# Altium PCB Host.PcbDoc
Units mil, origin at the board's own origin, x right, y up, seen from the top; angles counter-clockwise.
Board outline 2990 x 2990 mil, 2 copper layers (Top Layer, Bottom Layer); 34 components, 33 nets, 209 pads, 62 vias.
Unrouted connection lines stored in the file: 28.
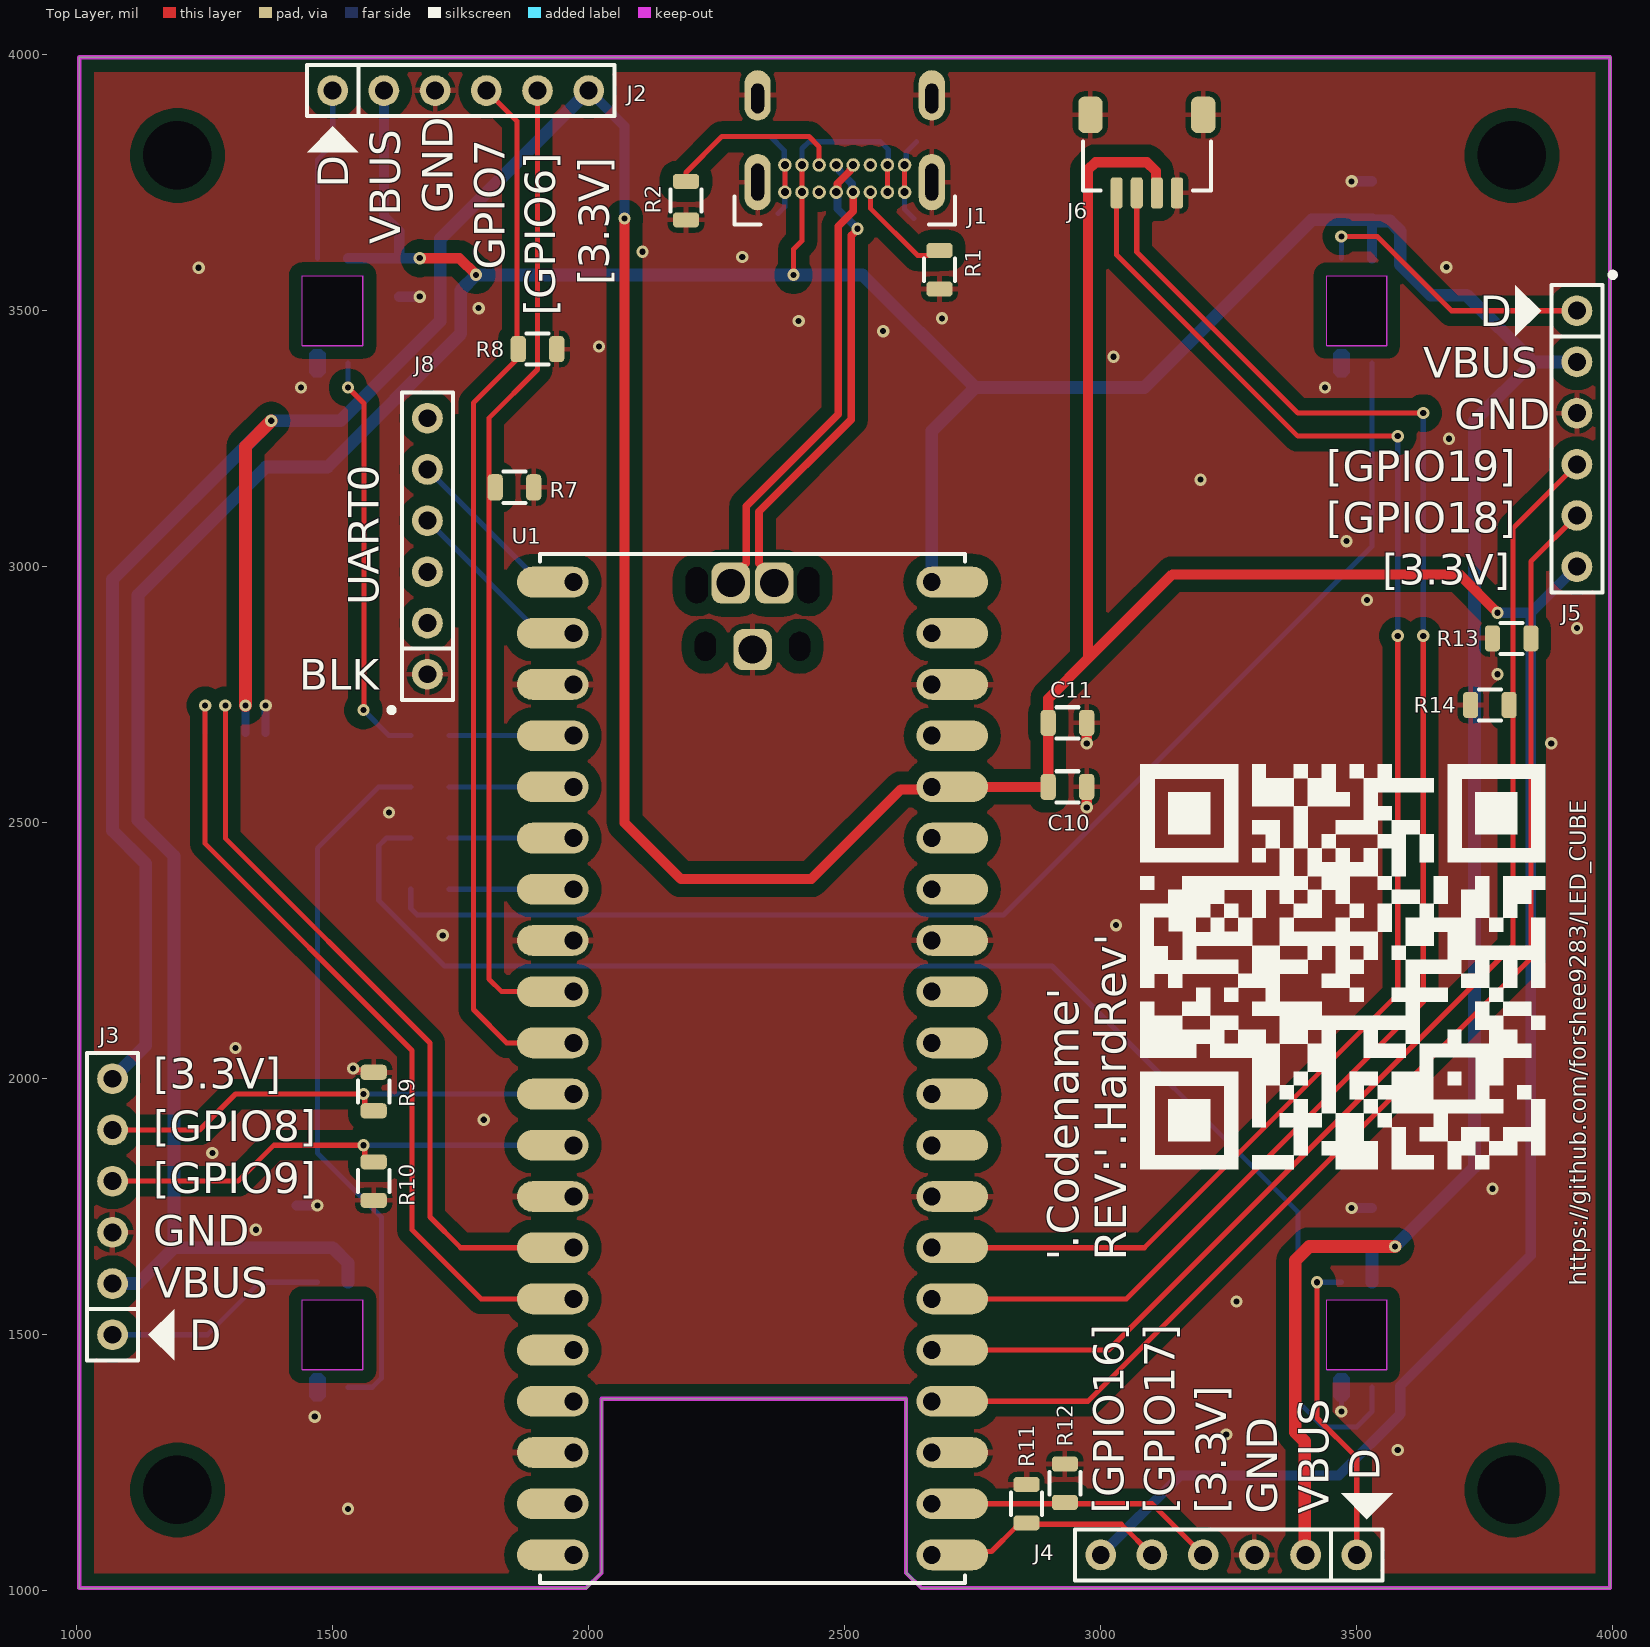
[diagram p0: Top Layer view]
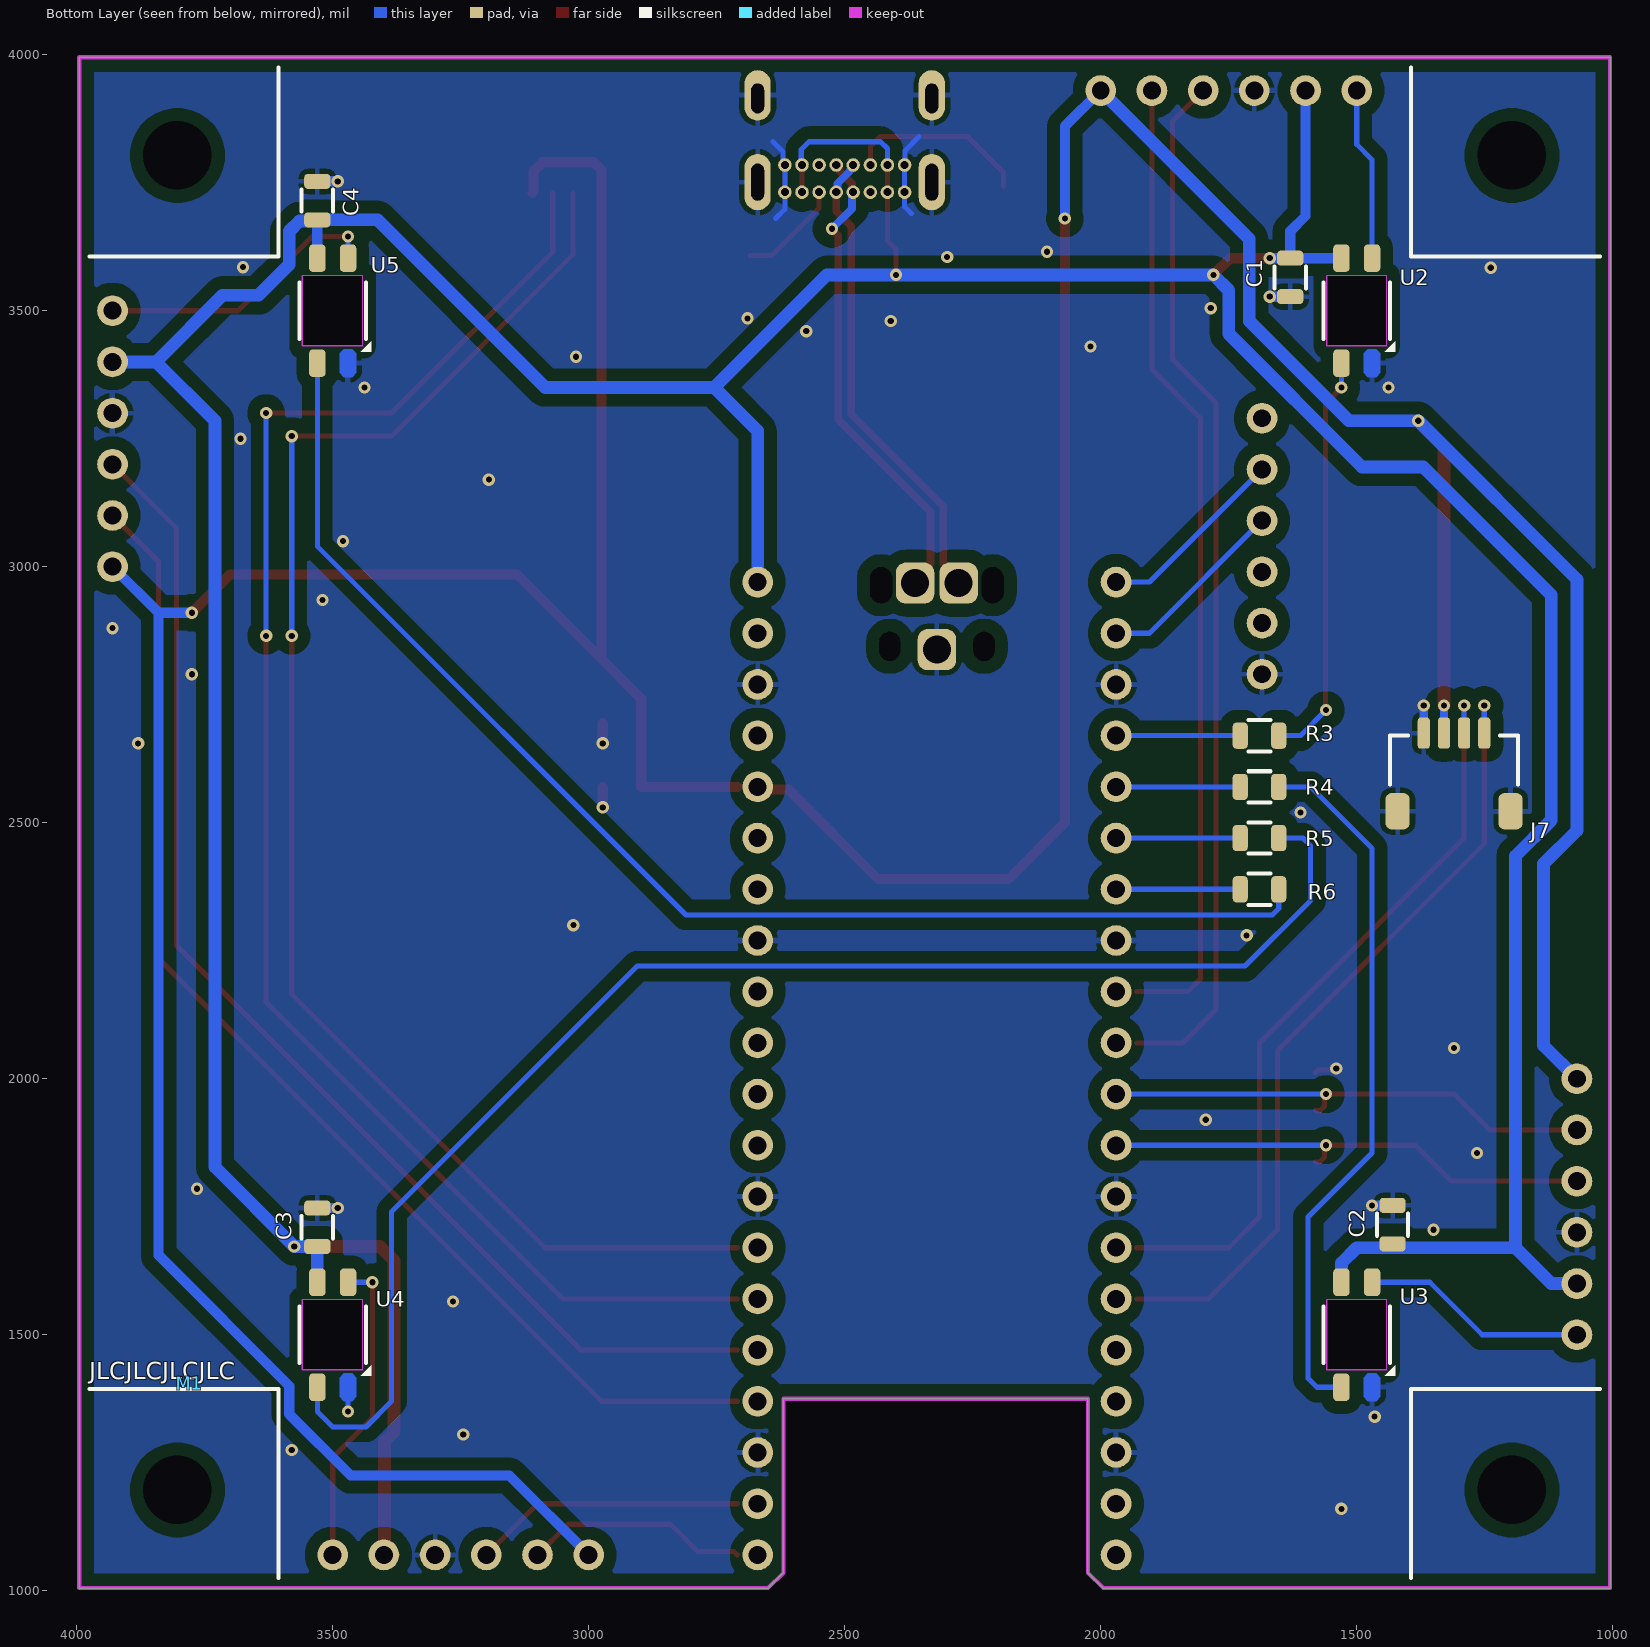
[diagram p1: Bottom Layer view, seen from below]

## Layer stack, top to bottom
Top Solder: solder mask 0.4, Solder Resist, Dk 3.5
Top Layer: signal copper 1.4
Dielectric 1: dielectric 12.6, FR-4, Dk 4.8
Bottom Layer: signal copper 1.4
Bottom Solder: solder mask 0.4, Solder Resist, Dk 3.5

## Board outline
1005,1005 1005,3995 3995,3995 3995,1005 2650,1005 2620,1035 2620,1375 2025,1375 2025,1035 1995,1005
cut-out: 1440.94,1568 1559.06,1568 1559.06,1432 1440.94,1432
cut-out: 3440.94,1568 3559.06,1568 3559.06,1432 3440.94,1432
cut-out: 3440.94,3568 3559.05,3568 3559.05,3432 3440.94,3432
cut-out: 1440.94,3568 1559.05,3568 1559.05,3432 1440.94,3432

## Design rules (kind name [scope] priority, off if disabled: settings)
Clearance Clearance_Poly [All vs InPoly] p1: gap=25 ignorepadtopadclearanceinfootprint=FALSE
Clearance [All] p2: gap=6.4 ignorepadtopadclearanceinfootprint=FALSE except(0: Arc-Hole Track-Hole SMDPad-Hole THPad-Hole Via-Hole Fill-Hole Poly-Hole Region-Hole Text-Hole)
DiffPairsRouting [All] p1: maxlimit=10 minlimit=10 mostfreqgap=10 toplayer_minwidth=15 toplayer_maxwidth=15 toplayer_prefwidth=15 bottomlayer_minwidth=15 bottomlayer_maxwidth=15 bottomlayer_prefwidth=15 maxuncoupledlength=500
HoleSize [All] p1: absolutevalues=TRUE maxlimit=99999 minlimit=1 maxpercent=80.000 minpercent=20.000
MinimumSolderMaskSliver [All] p1: minsoldermaskwidth=1.9
PlaneConnect [All] p1: pad.planeconnectstyle=Relief pad.reliefexpansion=20 pad.reliefentries=4 pad.reliefconductorwidth=10 pad.reliefairgap=10 via.planeconnectstyle=Direct via.reliefexpansion=20 via.reliefentries=4 via.reliefconductorwidth=10 via.reliefairgap=10
PolygonConnect [All] p1: thpad.connectstyle=Relief thpad.reliefconductorwidth=10 thpad.reliefentries=4 thpad.polygonreliefangle="90 Angle" thpad.airgapwidth=10 smdpad.connectstyle=Relief smdpad.reliefconductorwidth=10 smdpad.reliefentries=4 smdpad.polygonreliefangle="90 Angle" smdpad.airgapwidth=10 via.connectstyle=Direct via.reliefconductorwidth=10 via.reliefentries=4 via.polygonreliefangle="90 Angle" via.airgapwidth=10
RoutingVias [All] p1: holewidth=28 width=50 viastyle="Through Hole" minholewidth=28 minwidth=50 maxholewidth=28 maxwidth=50
SilkToSolderMaskClearance [IsPad] p1: minsilkscreentomaskgap=0 clearancetoexposedcopper=TRUE
SolderMaskExpansion [All] p1: expansion=4 istentingtop=FALSE
SupplyNets "Schematic Supply Nets_2" [InNet('GND')] p1: voltage=0.000
SupplyNets "Schematic Supply Nets_1" [InNet('USB_VBUS')] p2: voltage=0.000
SupplyNets "Schematic Supply Nets" [InNet('3.3V')] p3: voltage=0.000
Width [All] p1: maxlimit=10000 minlimit=6 preferedwidth=10
25 further rules are at their usual default settings.

## Classes and differential pairs
differential pair class DIFF90: USB_D USB_D_CON
differential pair USB_D: +USB_D_P -USB_D_N

## Components (designator, comment, footprint, x,y, rotation, side; value= is the part's Value field where it differs from the comment)
C1 "0.1µF" Chip0805 1630,3565 r90 bottom
C2 "0.1µF" Chip0805 1430,1715 r270 bottom
C3 "0.1µF" Chip0805 3530,1710 r270 bottom
C4 "0.1µF" Chip0805 3530,3715 r270 bottom
C10 "0.1µF" Chip0805 2935,2570 r180 top
C11 "10µF" Chip0805 2935,2695 r180 top
J1 "2137160001" MOLEX_2137160001 2500,3758 r180 top locked
J2 "HEADER_1x6_NO_BOM" HEADER_1x6_100mil_NP 1750,3930 r0 top locked
J3 "HEADER_1x6_NO_BOM" HEADER_1x6_100mil_NP 1070,1750 r90 top locked
J4 "HEADER_1x6_NO_BOM" HEADER_1x6_100mil_NP 3250,1070 r180 top locked
J5 "HEADER_1x6_NO_BOM" HEADER_1x6_100mil_NP 3930,3250 r270 top
J6 "SM04B-SRSS-TB" JST_SM04B-SRSS-TB 3085,3825 r180 top
J7 "SM04B-SRSS-TB" JST_SM04B-SRSS-TB 1305,2580 r180 bottom
J8 "HEADER_1x6_NO_BOM" HEADER_1x6_100mil_NP 1685,3040 r90 top
M1 "JLC_NUMBER" JLC_NUMBER 3780,1405 r180 bottom
R1 "5.1k" Chip0805 2685,3580 r90 top
R2 "5.1k" Chip0805 2190,3715 r90 top
R3 "330" Chip0805 1690,2670 r180 bottom
R4 "330" Chip0805 1690,2570 r180 bottom
R5 "330" Chip0805 1690,2470 r180 bottom
R6 "330" Chip0805 1690,2370 r180 bottom
R7 "1M" Chip0805 1855,3155 r180 top
R8 "1M" Chip0805 1900,3425 r180 top
R9 "1M" Chip0805 1580,1975 r270 top
R10 "1M" Chip0805 1580,1800 r90 top
R11 "1M" Chip0805 2855,1170 r270 top
R12 "1M" Chip0805 2930,1210 r270 top
R13 "1M" Chip0805 3802.4,2860 r0 top
R14 "1M" Chip0805 3760,2730 r0 top
U1 "Raspberry Pi Pico W" RASPBERRY_PI_PICO_W 2320,2020 r0 top
U2 "SK6812MINI-E" SK6812MINI-E 1500,3500 r90 bottom
U3 "SK6812MINI-E" SK6812MINI-E 1500,1500 r90 bottom
U4 "SK6812MINI-E" SK6812MINI-E 3500,1500 r90 bottom
U5 "SK6812MINI-E" SK6812MINI-E 3500,3500 r90 bottom

## Footprints (in the part's own frame and the unit in brackets; to place one, negate y for a bottom-side part, rotate by r counter-clockwise, add the part's x,y. Pads: shape width x height; smd on the part's side, far side on the other; paste and mask are expansions set on the pad)
Chip0805 [mm] "Chip Resistor, 2-Leads, Body 2.05x1.25mm, IPC Medium Density"
  rrect50% 0.75x1.3 smd: 1(-0.955,0) 2(0.955,0)
  silkscreen extent -0.55,-0.77 0.55,0.77, body extent -0.95,-0.55 0.95,0.55, height 0.5
HEADER_1x6_100mil_NP [mil]
  round 60 hole 35: 1(-250,0) 2(-150,0) 3(-50,0) 4(50,0) 5(150,0) 6(250,0)
  silkscreen extent -300,-50 300,50
JLC_NUMBER [mil]
JST_SM04B-SRSS-TB [mm]
  rrect50% 0.6x1.55 smd: 1(-1.627,2.413) 2(-0.627,2.413) 3(0.373,2.413) 4(1.373,2.413)
  rrect50% 1.2x1.8 smd: M1(-2.927,-1.462) M2(2.673,-1.462)
  silkscreen extent -3.3,-0.13 3.05,2.29, body extent -3.13,-2.12 2.87,2.83, height 2.97
MOLEX_2137160001 [mm]
  oval 1.3x2.794 hole 0.635 slot 1.829 at 90 deg: 1(-4.32,0.175) 2(4.32,0.175)
  oval 1.3x2.5 hole 0.635 slot 1.473 at 90 deg copper offset 0,-0.15: 3(-4.32,-3.975) 4(4.32,-3.975)
  round 0.673 hole 0.4: A1(-2.97,0.675) A4(-2.12,0.675) A5(-1.27,0.675) A6(-0.42,0.675) A7(0.42,0.675) A8(1.27,0.675) A9(2.12,0.675) A12(2.97,0.675) B1(2.97,-0.675) B4(2.12,-0.675) B5(1.27,-0.675) B6(0.42,-0.675) B7(-0.42,-0.675) B8(-1.27,-0.675) B9(-2.12,-0.675) B12(-2.97,-0.675)
  silkscreen extent -5.46,0.89 5.46,2.29, body extent -4.82,-7.39 4.82,1.58, height 3.37
RASPBERRY_PI_PICO_W [mil]
  round 5 hole 43.31 slot 70.87 at 90 deg unplated: 0(-108.9,943.82) 0(108.9,943.82)
  round 5 hole 41.34 slot 57.09 at 90 deg unplated: 0(-92.09,824.53) 0(92.09,824.53)
  oval 140x60 smd: 1(-390,950) 2(-390,850) 3(-390,750) 4(-390,650) 5(-390,550) 6(-390,450) 7(-390,350) 8(-390,250) 9(-390,150) 10(-390,50) 11(-390,-50) 12(-390,-150) 13(-390,-250) 14(-390,-350) 15(-390,-450) 16(-390,-550) 17(-390,-650) 18(-390,-750) 19(-390,-850) 20(-390,-950) 21(390,-950) 22(390,-850) 23(390,-750) 24(390,-650) 25(390,-550) 26(390,-450) 27(390,-350) 28(390,-250) 29(390,-150) 30(390,-50) 31(390,50) 32(390,150) 33(390,250) 34(390,350) 35(390,450) 36(390,550) 37(390,650) 38(390,750) 39(390,850) 40(390,950)
  round 60 hole 35: 1(-350,950) 2(-350,850) 3(-350,750) 4(-350,650) 5(-350,550) 6(-350,450) 7(-350,350) 8(-350,250) 9(-350,150) 10(-350,50) 11(-350,-50) 12(-350,-150) 13(-350,-250) 14(-350,-350) 15(-350,-450) 16(-350,-550) 17(-350,-650) 18(-350,-750) 19(-350,-850) 20(-350,-950) 21(350,-950) 22(350,-850) 23(350,-750) 24(350,-650) 25(350,-550) 26(350,-450) 27(350,-350) 28(350,-250) 29(350,-150) 30(350,-50) 31(350,50) 32(350,150) 33(350,250) 34(350,350) 35(350,450) 36(350,550) 37(350,650) 38(350,750) 39(350,850) 40(350,950)
  rrect50% 75x80 hole 55: TP1(0,818.11) TP2(42.5,948.03) TP3(-42.5,948.03)
  silkscreen extent -415,-1005 415,1005, body extent -413,-1003 413,1058, height 146
SK6812MINI-E [mil]
  rrect50% 54x32.28 smd: 1(102.53,30) 2(102.53,-30) 4(-102.53,30)
  round 1 smd: 3(-102.53,-30)
  Top Layer region: -83.6,-13.86 -75.53,-21.93 -75.53,-38.07 -83.6,-46.14 -121.46,-46.14 -129.53,-38.07 -129.53,-21.93 -121.46,-13.86
  Keep-Out Layer lines w1.97: -68,-59.06 -68,59.06 68,59.06 68,-59.06 -68,-59.06
  silkscreen extent -80,-75 55,65, body extent -116,-55 116,55, height 38

## Part data
C1 C2 C3 C4 C10: library part C2012X7T2E104K125AA, "CAP CER 0.1UF 250V 10% X7T 0805", Manufacturer="TDK Corporation", Operating Temperature="-55°C ~ 125°C", Package / Case="0805 (2012 Metric)", Ratings=-, Supplier Part Number 1=445-7749-1-ND, Temperature Coefficient=X7T, Tolerance=±10%, Voltage=250V, Applications="General Purpose", Capacitance=0.1µF, Features=-, Height - Seated (Max)=-, HelpURL=http://product.tdk.com/capacitor/mlcc/en/documents/mlcc_commercial_midvoltage_en.pdf, Lead Spacing=-, Lead Style=-, Manufacturer Part Number=C2012X7T2E104K125AA, Mounting Type="Surface Mount, MLCC", PartNumber=C2012X7T2E104K125AA, Series=C, Size / Dimension="0.079\" L x 0.049\" W (2.00mm x 1.25mm)", Supplier 1=Digi-Key, Supplier 2=Mouser, Thickness (Max)="0.057\" (1.45mm)"
C11: library part C2012X5R1C106K125AC, "CAP CER 10UF 16V 10% X5R 0805", Manufacturer="TDK Corporation", Operating Temperature="-55°C ~ 85°C", Package / Case="0805 (2012 Metric)", Ratings=-, Supplier Part Number 1=445-7646-1-ND, Temperature Coefficient=X5R, Tolerance=±10%, Voltage=16V, Applications="General Purpose", Capacitance=10µF, Features=-, Height - Seated (Max)=-, HelpURL=http://product.tdk.com/capacitor/mlcc/en/documents/mlcc_commercial_general_en.pdf, Lead Spacing=-, Lead Style=-, Manufacturer Part Number=C2012X5R1C106K125AC, Mounting Type="Surface Mount, MLCC", PartNumber=C2012X5R1C106K125AC, Series=C, Size / Dimension="0.079\" L x 0.049\" W (2.00mm x 1.25mm)", Supplier 1=Digi-Key, Supplier 2=Mouser, Thickness (Max)="0.057\" (1.45mm)"
J1: "CONN RCPT USB2.0 TYPE C 24POS RA", Manufacturer="Molex, LLC", Supplier Part Number 1=900-2137160001CT-ND, HelpURL=https://www.molex.com/pdm_docs/sd/2137160001_sd.pdf, Manufacturer Part Number=2137160001, PartNumber=2137160001, Supplier 1=Digi-Key, Supplier 2=Mouser, Supplier Part Number 2=538-213716-0001
J6 J7: "CONN HEADER SMD R/A 4POS 1MM", Manufacturer="JST Sales America Inc.", Supplier Part Number 1=455-SM04B-SRSS-TBCT-ND, HelpURL=https://www.jst-mfg.com/product/pdf/eng/eSH.pdf, Manufacturer Part Number=SM04B-SRSS-TB, PartNumber=SM04B-SRSS-TB, Supplier 1=Digi-Key, Supplier 2=Mouser
M1: "JLC Order Number Location", Manufacturer Part Number=JLC_NUMBER, PartNumber=JLC_NUMBER
R1 R2: library part CRCW08055K10FKEA, "RES 5.10K OHM 1/8W 1% 0805 SMD", Manufacturer="Vishay Dale", Package / Case="0805 (2012 Metric)", Power (Watts)="0.125W, 1/8W", Supplier Part Number 1=541-5.10KCCT-ND, Temperature Coefficient=±100ppm/°C, Tolerance=±1%, Composition="Thick Film", Features="Automotive AEC-Q200 Qualified", Height="0.020\" (0.50mm)", HelpURL=http://www.vishay.com/doc?20035, Manufacturer Part Number=CRCW08055K10FKEA, Number of Terminations=2, PartNumber=CRCW08055K10FKEA, Resistance=5.1k, Series=CRCW, Size / Dimension="0.079\" L x 0.049\" W (2.00mm x 1.25mm)", Supplier 1=Digi-Key, Supplier 2=Mouser, Supplier Device Package="0805 (2012 Metric)"
R3 R4 R5 R6: library part CRCW0805330RFKEA, "RES 330 OHM 1/8W 1% 0805 SMD", Manufacturer="Vishay Dale", Package / Case="0805 (2012 Metric)", Power (Watts)="0.125W, 1/8W", Supplier Part Number 1=541-330CCT-ND, Temperature Coefficient=±100ppm/°C, Tolerance=±1%, Composition="Thick Film", Features="Automotive AEC-Q200 Qualified", Height="0.020\" (0.50mm)", HelpURL=http://www.vishay.com/doc?20035, Manufacturer Part Number=CRCW0805330RFKEA, Number of Terminations=2, PartNumber=CRCW0805330RFKEA, Resistance=330, Series=CRCW, Size / Dimension="0.079\" L x 0.049\" W (2.00mm x 1.25mm)", Supplier 1=Digi-Key, Supplier 2=Mouser, Supplier Device Package="0805 (2012 Metric)"
R7 R8 R9 R10 R11 R12 R13 R14: library part CRCW08051M00FKEA, "RES 1.00M OHM 1/8W 1% 0805 SMD", Manufacturer="Vishay Dale", Package / Case="0805 (2012 Metric)", Power (Watts)="0.125W, 1/8W", Supplier Part Number 1=541-1.00MCCT-ND, Temperature Coefficient=±100ppm/°C, Tolerance=±1%, Composition="Thick Film", Features="Automotive AEC-Q200 Qualified", Height="0.020\" (0.50mm)", HelpURL=http://www.vishay.com/doc?20035, Manufacturer Part Number=CRCW08051M00FKEA, Number of Terminations=2, PartNumber=CRCW08051M00FKEA, Resistance=1M, Series=CRCW, Size / Dimension="0.079\" L x 0.049\" W (2.00mm x 1.25mm)", Supplier 1=Digi-Key, Supplier 2=Mouser, Supplier Device Package="0805 (2012 Metric)"
U1: "RASPBERRY PI PICO W", Manufacturer="Raspberry Pi", Manufacturer Part Number=SC0918, Supplier Part Number 1=2648-SC0918CT-ND, PartNumber="Raspberry Pi Pico W", Supplier 1=Digi-Key
U2 U3 U4 U5: "Addressable RGB LED", Manufacturer="Adafruit Industries LLC", Supplier Part Number 1=1528-4960-ND, Datasheets=https://cdn-shop.adafruit.com/product-files/4960/4960_SK6812MINI-E_REV02_EN.pdf, Manufacturer Part Number=SK6812MINI-E, PartNumber=SK6812MINI-E, Supplier 1=Digi-Key
J2 J3 J4 J5 J8: Manufacturer Part Number=HEADER_1x6_NO_BOM, PartNumber=HEADER_1x6_NO_BOM

## Free pads (board coordinates)
  round 10 hole 133.86 unplated: 0(1196.85,1196.85) 0(1196.85,3803.15) 0(3803.15,1196.85) 0(3803.15,3803.15)

## Via types
v1: diameter 24, hole 12, Top Layer to Bottom Layer, tented both sides, 62 vias

## Nets (pads, with @x,y where several pads share a name; then routed paths per layer and width w, separated by ;. In a path a pad name is that pad's centre, name@x,y a point inside that pad or via, vN(x,y) a via of type N, cw(c..) or ccw(c..) an arc to the next point about the centre after c; other vN are vias at no path point)
3.3V: C10.2 C11.2 J2.6 J3.6 J4.6 J5.6 J6.2 J7.2 U1.36 | length 10333.2
  Top Layer w20: v1(2070,3680) 2070,2500 2180,2390 2435,2390 2610,2565 2665,2565 U1.36@2670,2570 ; U1.36@2710,2570 C10.2 C11.2 2897.4,2742.4 2975,2820 ; J6.2 3107.87,3731.81 3107.87,3772.13 3090,3790 2990,3790 2975,3775 2975,2820 ; v1(3775,2910) 3700,2985 3140,2985 2975,2820
  Top Layer w25: v1(1329.68,2729.05) 1329.68,3234.68 v1(1380,3285)
  Bottom Layer w16: J7.2 v1(1329.68,2729.05)
  Bottom Layer w20: J2.6 2070,3860 v1(2070,3680) ; J4.6 3155,1225 3465,1225 3585,1345 3585,1400 3840,1655 3840,2910 ; v1(3775,2910) 3840,2910 ; J5.6 3840,2910
  Bottom Layer w25: J3.6 1135,2065 1135,2420 1070,2485 1070,2975 v1(1380,3285) 1515,3285 1710,3480 1710,3640 J2.6
DATA_0: R3.2 U2.4 | length 803.8
  Top Layer w10: v1(1530,3350) 1561,3319 1561,2721 v1(1560,2720)
  Bottom Layer w10: v1(1530,3350) U2.4 ; v1(1560,2720) 1610,2670 R3.2
DATA_0_OUT: J2.1 U2.2 | length 339.9
  Bottom Layer w10: U2.2 1470,3795 1500,3825 J2.1
DATA_1: R4.2 U3.4 | length 1391.1
  Bottom Layer w10: U3.4 1577.47,1397.47 1595,1415 1595,1730 1470,1855 1470,2450 1590,2570 R4.2
DATA_1_OUT: J3.1 U3.2 | length 442.5
  Bottom Layer w10: J3.1 1255,1500 1357.53,1602.53 U3.2
DATA_2: R5.2 U4.4 | length 2817.9
  Bottom Layer w10: R5.2 1605,2470 1590,2455 1590,2348.3 1718.3,2220 2905,2220 3385,1740 3385,1370 3435,1320 3500,1320 3530,1350 U4.4
DATA_2_OUT: J4.1 U4.2 | length 612.1
  Top Layer w10: v1(3422.53,1602.53) 3422.53,1337.47 3500,1260 J4.1
  Bottom Layer w10: v1(3422.53,1602.53) U4.2
DATA_3: R6.2 U5.4 | length 2575.9
  Bottom Layer w10: R6.2 1652.4,2332.6 1665,2320 2810,2320 3530,3040 U5.4
DATA_3_OUT: J5.1 U5.2 | length 562.5
  Top Layer w10: v1(3470,3645) 3540,3645 3685,3500 J5.1
  Bottom Layer w10: U5.2 v1(3470,3645)
GND: C1.1 C2.1 C3.1 C4.1 C10.1 C11.1 J1.1 J1.2 J1.3 J1.4 J1.A1 J1.A12 J1.B1 J1.B12 J2.3 J3.3 J4.3 J5.3 J6.1 J6.M1 J6.M2 J7.1 J7.M1 J7.M2 J8.1 R1.1 R2.1 R7.1 R8.1 R9.1 R10.1 R11.1 R12.1 R13.1 R14.1 U1.3 U1.8 U1.13 U1.18 U1.23 U1.28 U1.33 U1.38 U1.TP1 U2.3 U3.3 U4.3 U5.3 | length 825
  Top Layer w10: v1(1540,2020) 1542.68,2017.32 1575.28,2017.32 R9.1 ; J1.A12 J1.B1 ; J1.A1 J1.B12
  Top Layer w20: v1(2972.6,2530) C10.1 ; v1(2972.6,2655) C11.1
  Bottom Layer w10: 2355,3840 2381.93,3813.07 2381.93,3785.72 J1.B1 J1.A12 2382.93,3731.28 2382.93,3702.93 2370,3690 ; 2635,3680 2616.93,3698.07 J1.A1 J1.B12 2620.18,3787.83 2620.18,3810.18 2640,3830 ; v1(3470,1350) U4.3
  Bottom Layer w16: J7.1 v1(1369.06,2729.05)
  Bottom Layer w20: C2.1 v1(1470,1752.6) ; C1.1 v1(1670,3527.4) ; v1(3490,1747.6) C3.1 ; v1(3490,3752.6) C4.1
  other v1: 1530,1160 3580,1275 3245,1305 1465,1340 3265,1565 1350,1705 3765,1785 1265,1855 1795,1920 1310,2060 1715,2280 3030,2300 1610,2520 3880,2655 3775,2790 3930,2880 3520,2935 3480,3050 3195,3170 3680,3250 1438,3350 3438,3350 3025,3410 2020,3430 2575,3460 2410,3480 2690,3485 1785,3505 1238.24,3583.76 3675,3585 2300,3605 2105,3615
GPIO6: J2.5 R7.2 U1.9 | length 1909.7
  Top Layer w10: J2.5 1900,3385 1805,3290 1805,2195 1830,2170 U1.9@1930,2170
GPIO7: J2.4 R8.2 U1.10 | length 2037
  Top Layer w10: J2.4 1860,3870 1860,3405 1775,3320 1775,2135 1840,2070 U1.10@1930,2070
GPIO8: J3.5 R9.2 U1.11 | length 974.4
  Top Layer w10: J3.5 1240,1900 1310,1970 v1(1560,1970) 1562.68,1967.32 1562.68,1946.98 1572.26,1937.4 R9.2
  Bottom Layer w10: v1(1560,1970) U1.11@1970,1970
GPIO9: J3.4 R10.2 U1.12 | length 974.2
  Top Layer w10: J3.4 1315,1800 1385,1870 v1(1560,1870) 1562.68,1867.32 1562.68,1847.18 1572.26,1837.6 R10.2
  Bottom Layer w10: v1(1560,1870) U1.12@1970,1870
GPIO16: J4.5 R11.2 U1.21 | length 440
  Top Layer w10: U1.21@2710,1070 2716.82,1076.82 2786.82,1076.82 2834.11,1124.11 2834.59,1124.11 2840,1129.52 2840,1130 3040,1130 J4.5
GPIO17: J4.4 R12.2 U1.22 | length 531.4
  Top Layer w10: U1.22@2710,1170 3100,1170 J4.4
GPIO18: J5.5 R13.2 U1.24 | length 2390.6
  Top Layer w10: U1.24@2710,1370 2975,1370 3840,2235 3840,3010 J5.5
GPIO19: J5.4 R14.2 U1.25 | length 2414
  Top Layer w10: U1.25@2710,1470 3015,1470 3805,2260 3805,3075 J5.4
NetJ1_A5: J1.A5 R1.2 | length 204.7
  Top Layer w10: J1.A5 2550,3700 2642.44,3607.56 R1.2@2685,3607.56
NetJ1_B5: J1.B5 R2.2 | length 360.1
  Top Layer w10: R2.2@2190,3742.56 2190,3770 2260,3840 2430,3840 2450,3820 J1.B5
NetR3_1: R3.1 U1.4 | length 242.4
  Bottom Layer w10: R3.1 U1.4@1970,2670
NetR4_1: R4.1 U1.5 | length 242.4
  Bottom Layer w10: R4.1 U1.5@1970,2570
NetR5_1: R5.1 U1.6 | length 242.4
  Bottom Layer w10: R5.1 U1.6@1970,2470
NetR6_1: R6.1 U1.7 | length 242.4
  Bottom Layer w10: R6.1 U1.7@1970,2370
SCL0: J6.4 U1.27 | length 2981.7
  Top Layer w10: U1.27@2710,1670 3085,1670 3580,2165 v1(3580,2865) ; J6.4 3030.95,3609.05 3385,3255 v1(3580,3255)
  Bottom Layer w10: v1(3580,2865) v1(3580,3255)
SCL1: J7.4 U1.15 | length 1576.4
  Top Layer w10: v1(1250.94,2729.05) 1250.94,2459.06 1655,2055 1655,1705 1790,1570 U1.15@1930,1570
  Bottom Layer w10: J7.4 v1(1250.94,2729.05)
SDA0: J6.3 U1.26 | length 3115.6
  Top Layer w10: U1.26@2710,1570 3050,1570 3630,2150 v1(3630,2865) ; J6.3 3070.32,3614.68 3385,3300 v1(3630,3300)
  Bottom Layer w10: v1(3630,2865) v1(3630,3300)
SDA1: J7.3 U1.14 | length 1483.5
  Top Layer w10: v1(1290.32,2729.05) 1290.32,2469.69 1690,2070 1690,1730 1750,1670 U1.14@1930,1670
  Bottom Layer w10: J7.3 v1(1290.32,2729.05)
UART0_RX_TO_PI: J8.4 U1.2 | length 376.1
  Bottom Layer w10: J8.4 1905,2870 U1.2@1970,2870
UART0_TX_FROM_PI: J8.5 U1.1 | length 376.1
  Bottom Layer w10: J8.5 1905,2970 U1.1@1970,2970
USB_D_N: J1.A7 J1.B7 U1.TP2 | length 939.6
  Top Layer w15: U1.TP2 2362.5,2976.62 2332.5,3006.62 2332.5,3107.5 2512.5,3287.5 2512.5,3646.71 2525,3659.21 v1(2525,3660) ; J1.A7 2485.76,3733.72 2485.76,3748.12 2510.86,3773.23 2510.86,3775.66 2516.54,3781.33 J1.B7
  Bottom Layer w15: J1.A7 2485.76,3729.13 2485.76,3699.24 v1(2525,3660)
USB_D_P: J1.A6 J1.B6 U1.TP3 | length 929.3
  Top Layer w15: U1.TP3 2277.5,2976.62 2307.5,3006.62 2307.5,3117.86 2487.5,3297.86 2487.5,3665.13 2516.54,3694.17 J1.A6
  Bottom Layer w15: J1.B6 2483.46,3781.33 2489.14,3775.66 2489.14,3773.23 2514.24,3748.12 2514.24,3733.72 J1.A6
USB_VBUS: C1.2 C2.2 C3.2 C4.2 J1.A4 J1.A9 J1.B4 J1.B9 J2.2 J3.2 J4.2 J5.2 U1.40 U2.1 U3.1 U4.1 U5.1 | length 9696.9
  Top Layer w10: v1(2400,3570) 2400,3620 2416.54,3636.54 J1.A9 J1.B4 ; J1.A4 J1.B9 J1.B9@2585,3786.11
  Top Layer w20: v1(1670,3602.6) 1747.4,3602.6 v1(1780,3570)
  Top Layer w25: J4.2 3398.63,1071.37 3398.63,1291.37 3380,1310 3380,1645 3407.4,1672.4 v1(3575,1672.4)
  Bottom Layer w10: J1.B4 2416.54,3816.54 2430,3830 2570,3830 2585,3815 J1.B9@2585,3786.11
  Bottom Layer w20: U2.1 1530.04,3602.56 C1.2 C1.2 ; J2.2 1600,3685 1630,3655 C1.2 ; v1(1670,3602.6) C1.2 ; U5.1 C4.2 C4.2@3530.15,3677.55
  Bottom Layer w25: J3.2 1120,1600 1190,1670 ; U3.1 1530,1640 1500,1670 1190,1670 ; U1.40@2670,2970 2670,3265 2755,3350 ; U4.1 C3.2 v1(3575,1672.4) 3730,1827.4 3730,3285 3845,3400 ; C4.2 3532.26,3675.14 3564.86,3675.14 3585,3655 3585,3590 3645,3530 3715,3530 3845,3400 ; C4.2@3530.15,3677.55 3412.55,3677.55 3085,3350 2755,3350 ; J5.2 3845,3400 ; 1190,1670 1190,2435 1120,2505 1120,2945 1370,3195 1490,3195 1750,3455 1750,3540 v1(1780,3570) v1(2400,3570) 2535,3570 2755,3350
pads on no net: J1.A8 J1.B8 J8.2 J8.3 J8.6 U1.0 U1.16 U1.17 U1.19 U1.20 U1.29 U1.30 U1.31 U1.32 U1.34 U1.35 U1.37 U1.39

## Polygon pours and split planes (outlines as drawn)
GND on Top Layer "GND_L01_P000" (solid, remove dead copper, pour order 0): 1005,3995 3995,3995 3995,1005 1005,1005
GND on Bottom Layer "GND_L02_P001" (solid, remove dead copper, pour order 1): 998.15,3998.15 3988.15,3998.15 3988.15,1008.15 998.15,1008.15

## Keep-outs
Keep-Out Layer:
  the board outline again, w7.87

## Silkscreen, mask and mechanical layers (free items; w line width, h text height)
Top Overlay:
  drawing of 58 lines, arcs and shapes, not listed
  text "D" at 1530,3740 h60 r90
  text "GND" at 1734,3689.98 h60 r90
  text "VBUS" at 1632,3630 h60 r90
  text "GPIO7" at 1836,3580.02 h60 r90
  text "[3.3V]" at 2040,3550.03 h60 r90
  text "[GPIO6]" at 1935,3490.05 h60 r90
  text "D" at 3740,3470 h60
  text "VBUS" at 3630,3369 h60
  text "GND" at 3689.98,3268 h60
  text "[GPIO19]" at 3440.06,3167 h60
  text "[GPIO18]" at 3440.06,3066 h60
  text "[3.3V]" at 3550,2965 h60
  text "UART0" at 1590,2925 h60 r90
  text "BLK" at 1435,2760 h60
  text "[3.3V]" at 1150,1980 h60
  text "[GPIO8]" at 1150,1878 h60
  text "[GPIO9]" at 1150,1776 h60
  text "GND" at 1150,1674 h60
  text "'.Codename'  / REV:'.HardRev'" at 3050,1645 h62 r90
  text "https://github.com/forshee9283/LED_CUBE" at 3948.34,1596 h32 r90
  text "VBUS" at 1150,1572 h60
  text "D" at 1220,1470 h60
  text "D" at 3545,1215 h60 r90
  text "[GPIO16]" at 3045,1150.07 h60 r90
  text "[GPIO17]" at 3145,1150.07 h60 r90
  text "[3.3V]" at 3245,1150.07 h60 r90
  text "GND" at 3345,1150.07 h60 r90
  text "VBUS" at 3445,1150.07 h60 r90
Bottom Overlay:
  lines w7.87: 1025,1393.7 1393.7,1393.7 1393.7,1025 ; 1025,3606.3 1393.7,3606.3 1393.7,3975 ; 3606.3,1025 3606.3,1393.7 3975,1393.7 ; 3606.3,3975 3606.3,3606.3 3975,3606.3
Top Solder:
  text "é" at 1101.6,3229.59 h1000
Bottom Solder:
  text "é" at 1288.4,3229.59 h1000
Mechanical 1:
  the board outline again, w7.87

## Text inside footprints (layer, text, board x,y; h text height)
M1: Bottom Overlay "JLCJLCJLCJLC" at 3975.15,1412.87 h33.46
U2: Mechanical 1 "CUT / OUT" at 1450,3450 h30 r270
U3: Mechanical 1 "CUT / OUT" at 1450,1450 h30 r270
U4: Mechanical 1 "CUT / OUT" at 3450,1450 h30 r270
U5: Mechanical 1 "CUT / OUT" at 3450,3450 h30 r270